# Altium PCB Peak.PcbDoc
Units mil, origin at the board's own origin, x right, y up, seen from the top; angles counter-clockwise.
Board outline 1240 x 1340 mil, 4 copper layers (Top1, Signal2, Gnd3, Bottom4), stack 42.312 mil thick; 62 components, 63 nets, 294 pads, 236 vias.
Unrouted connection lines stored in the file: 56.
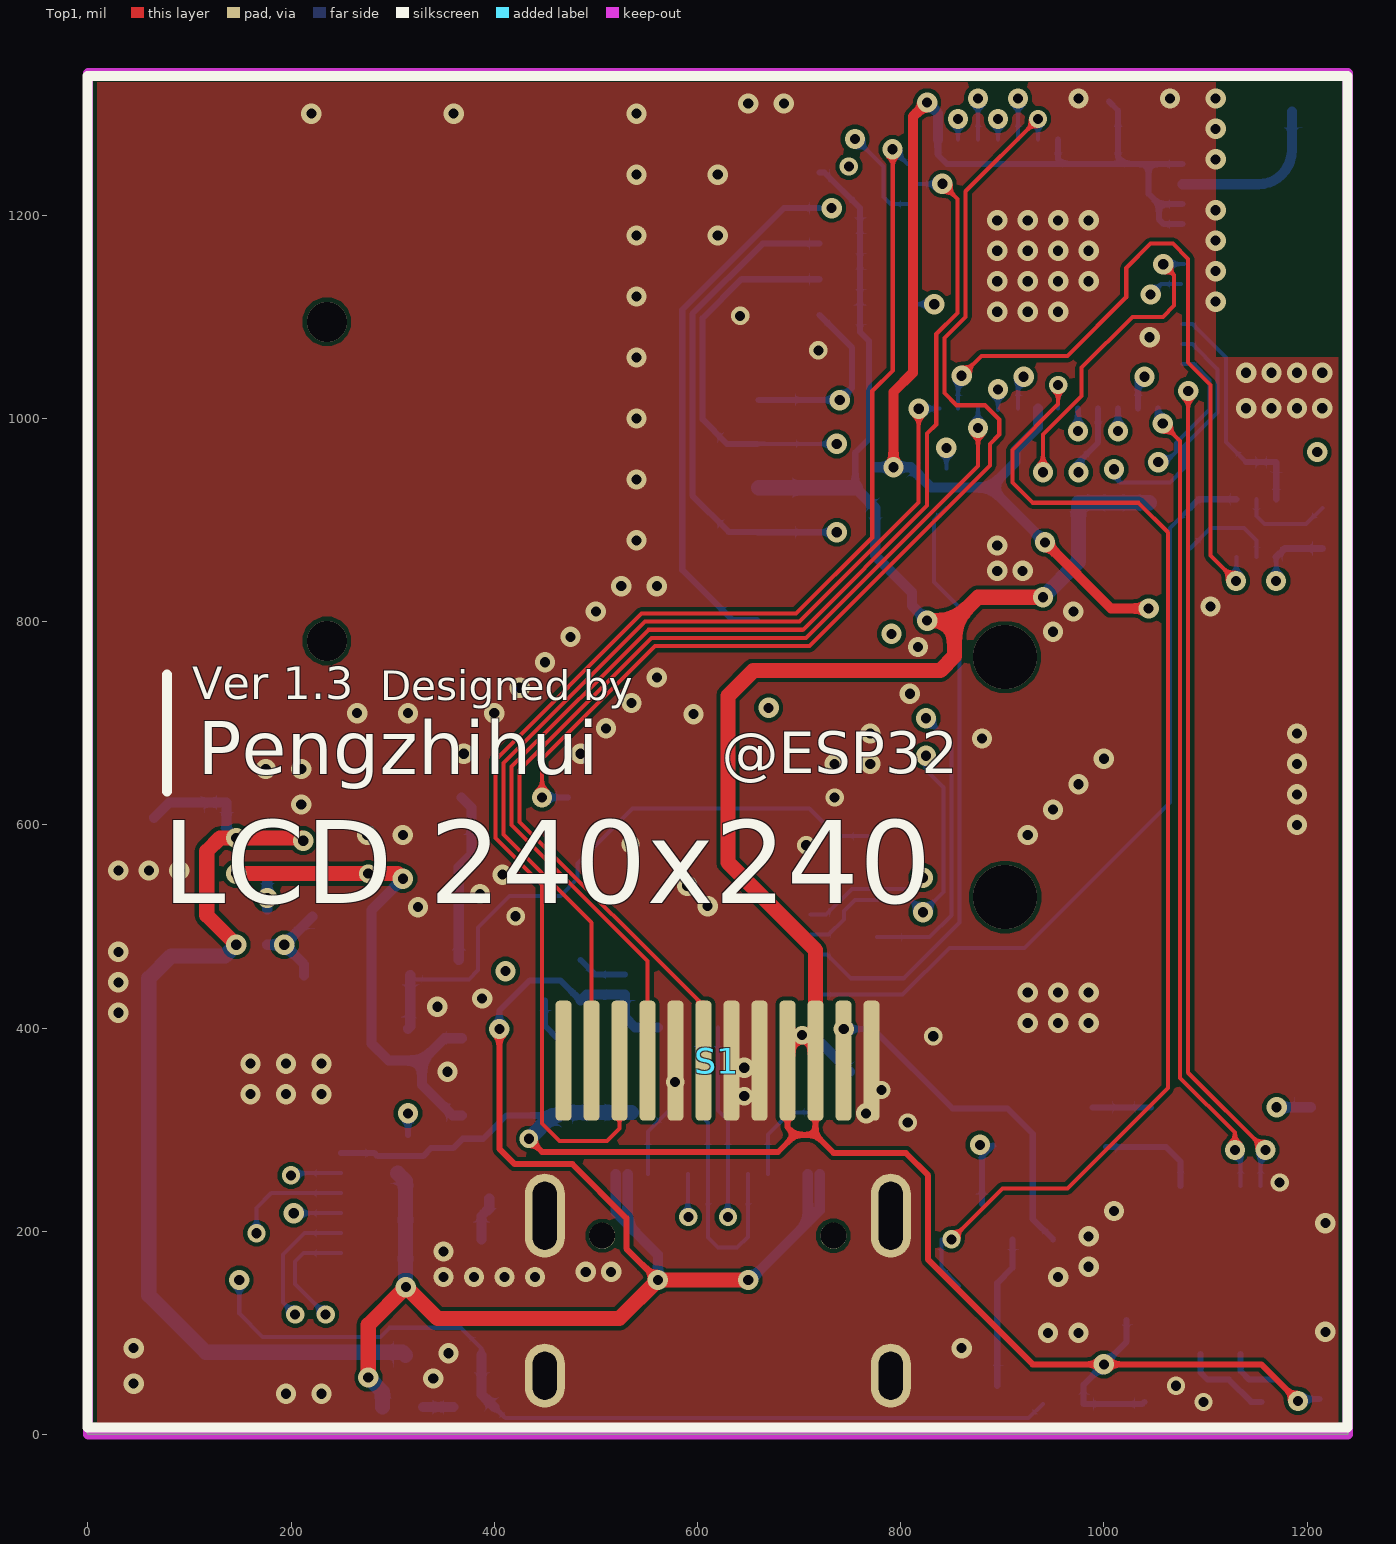
[diagram p0: Top1 view]
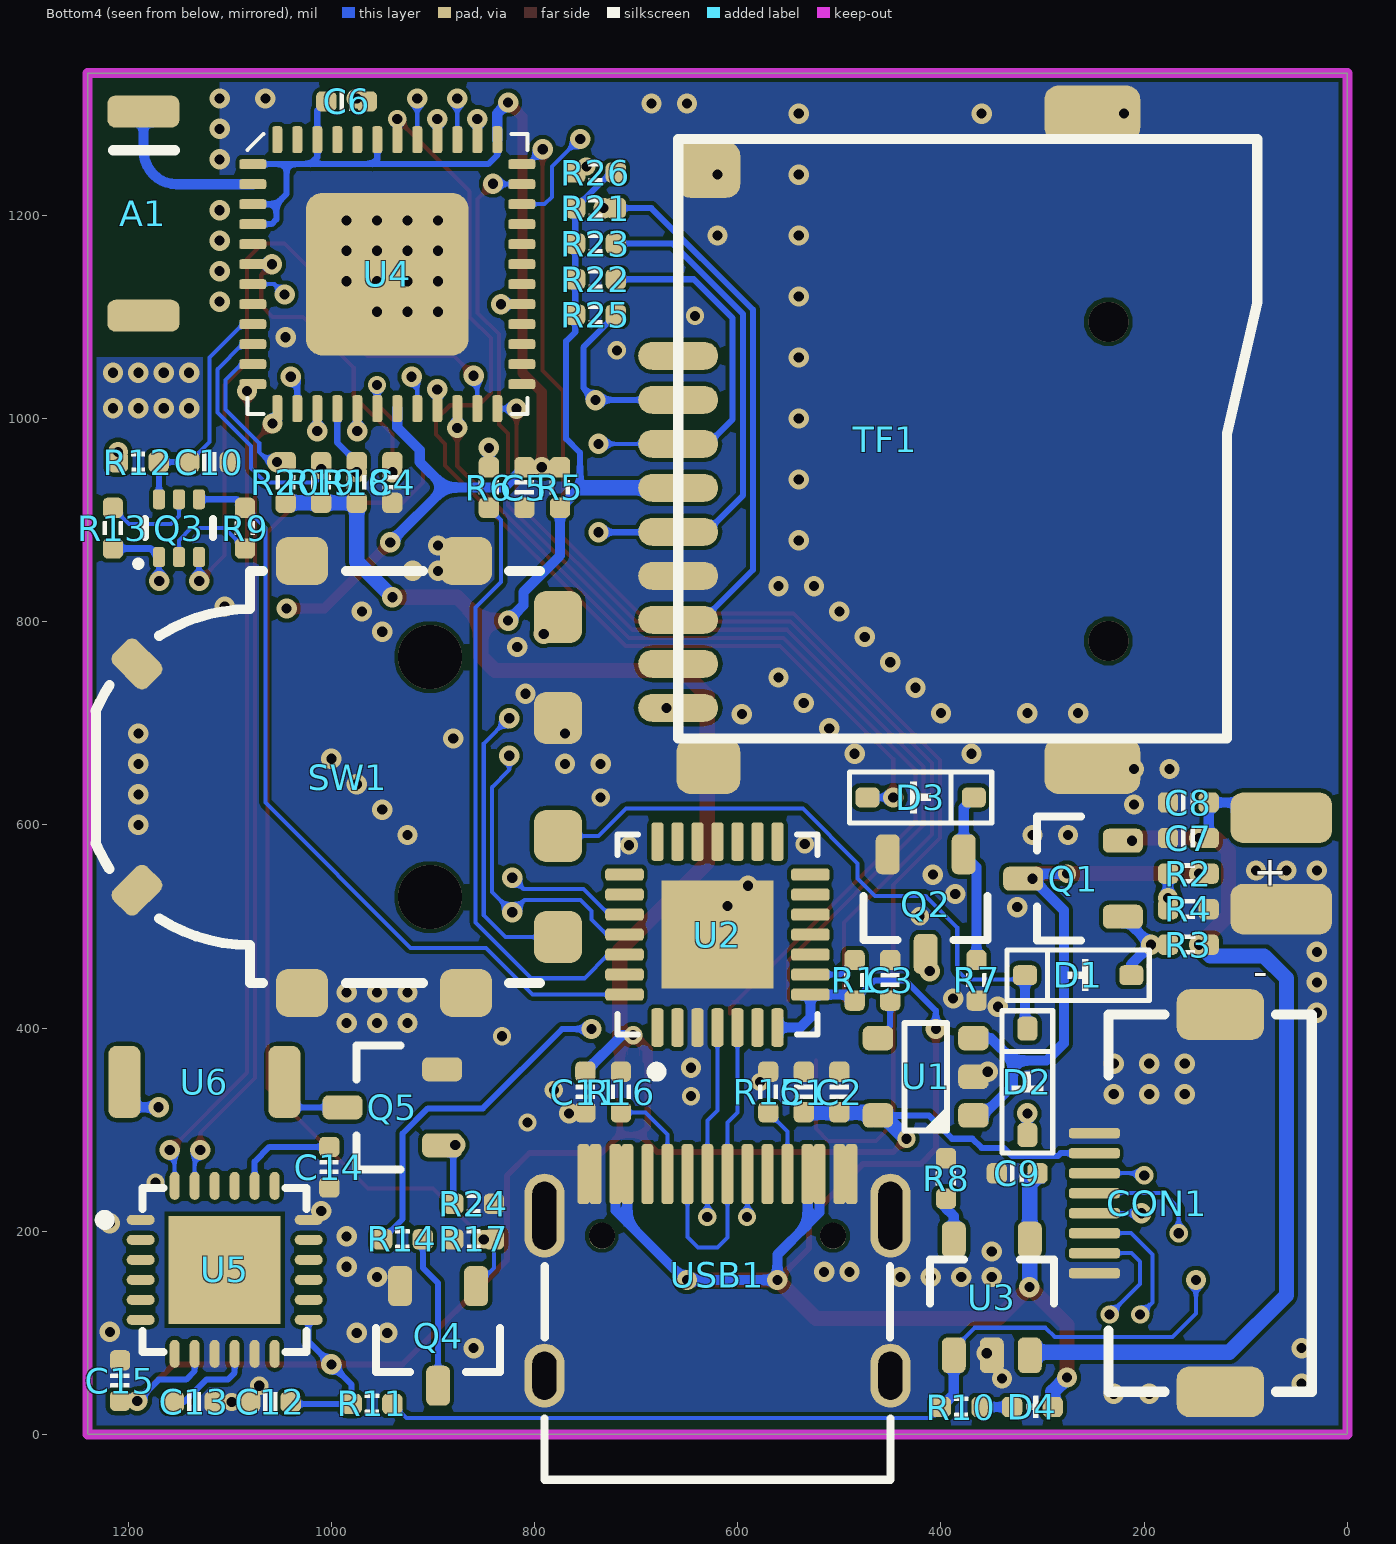
[diagram p1: Bottom4 view, seen from below]
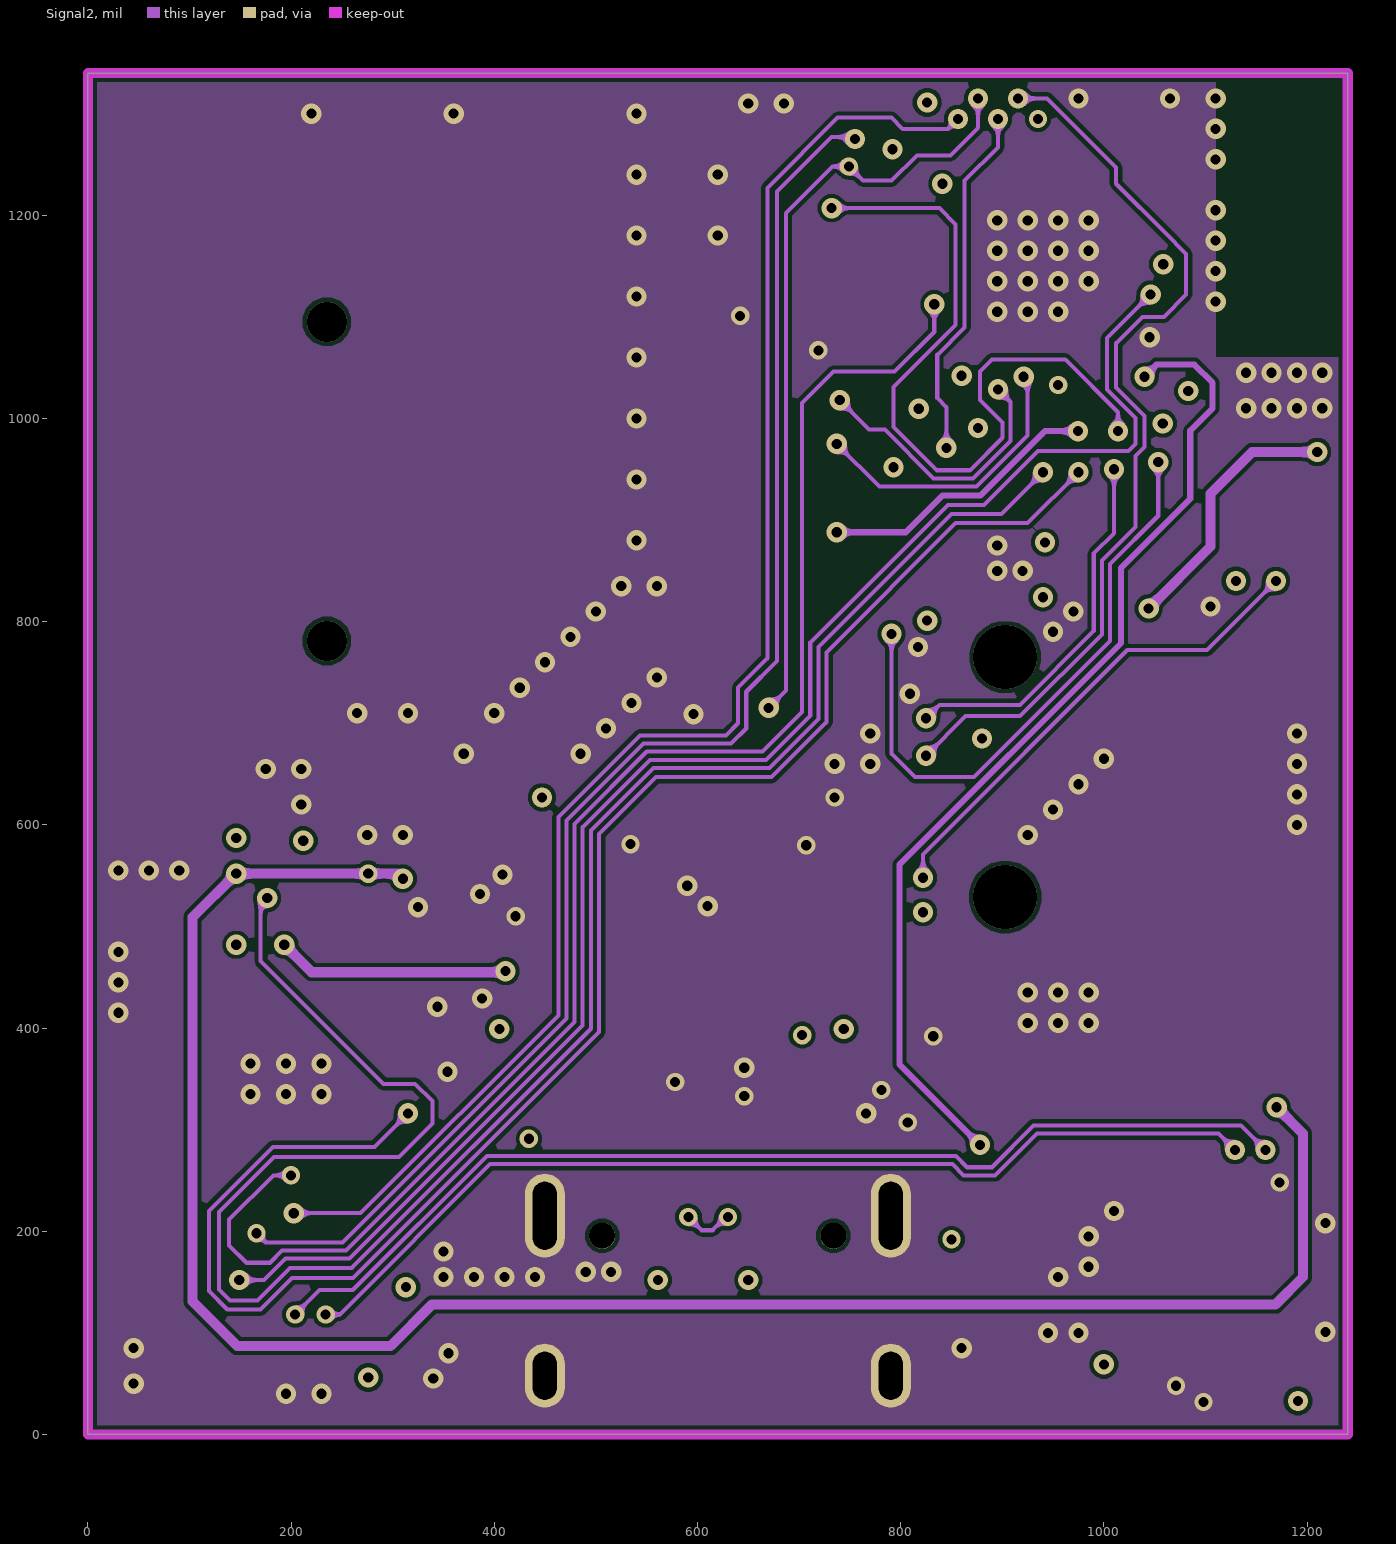
[diagram p2: Signal2]
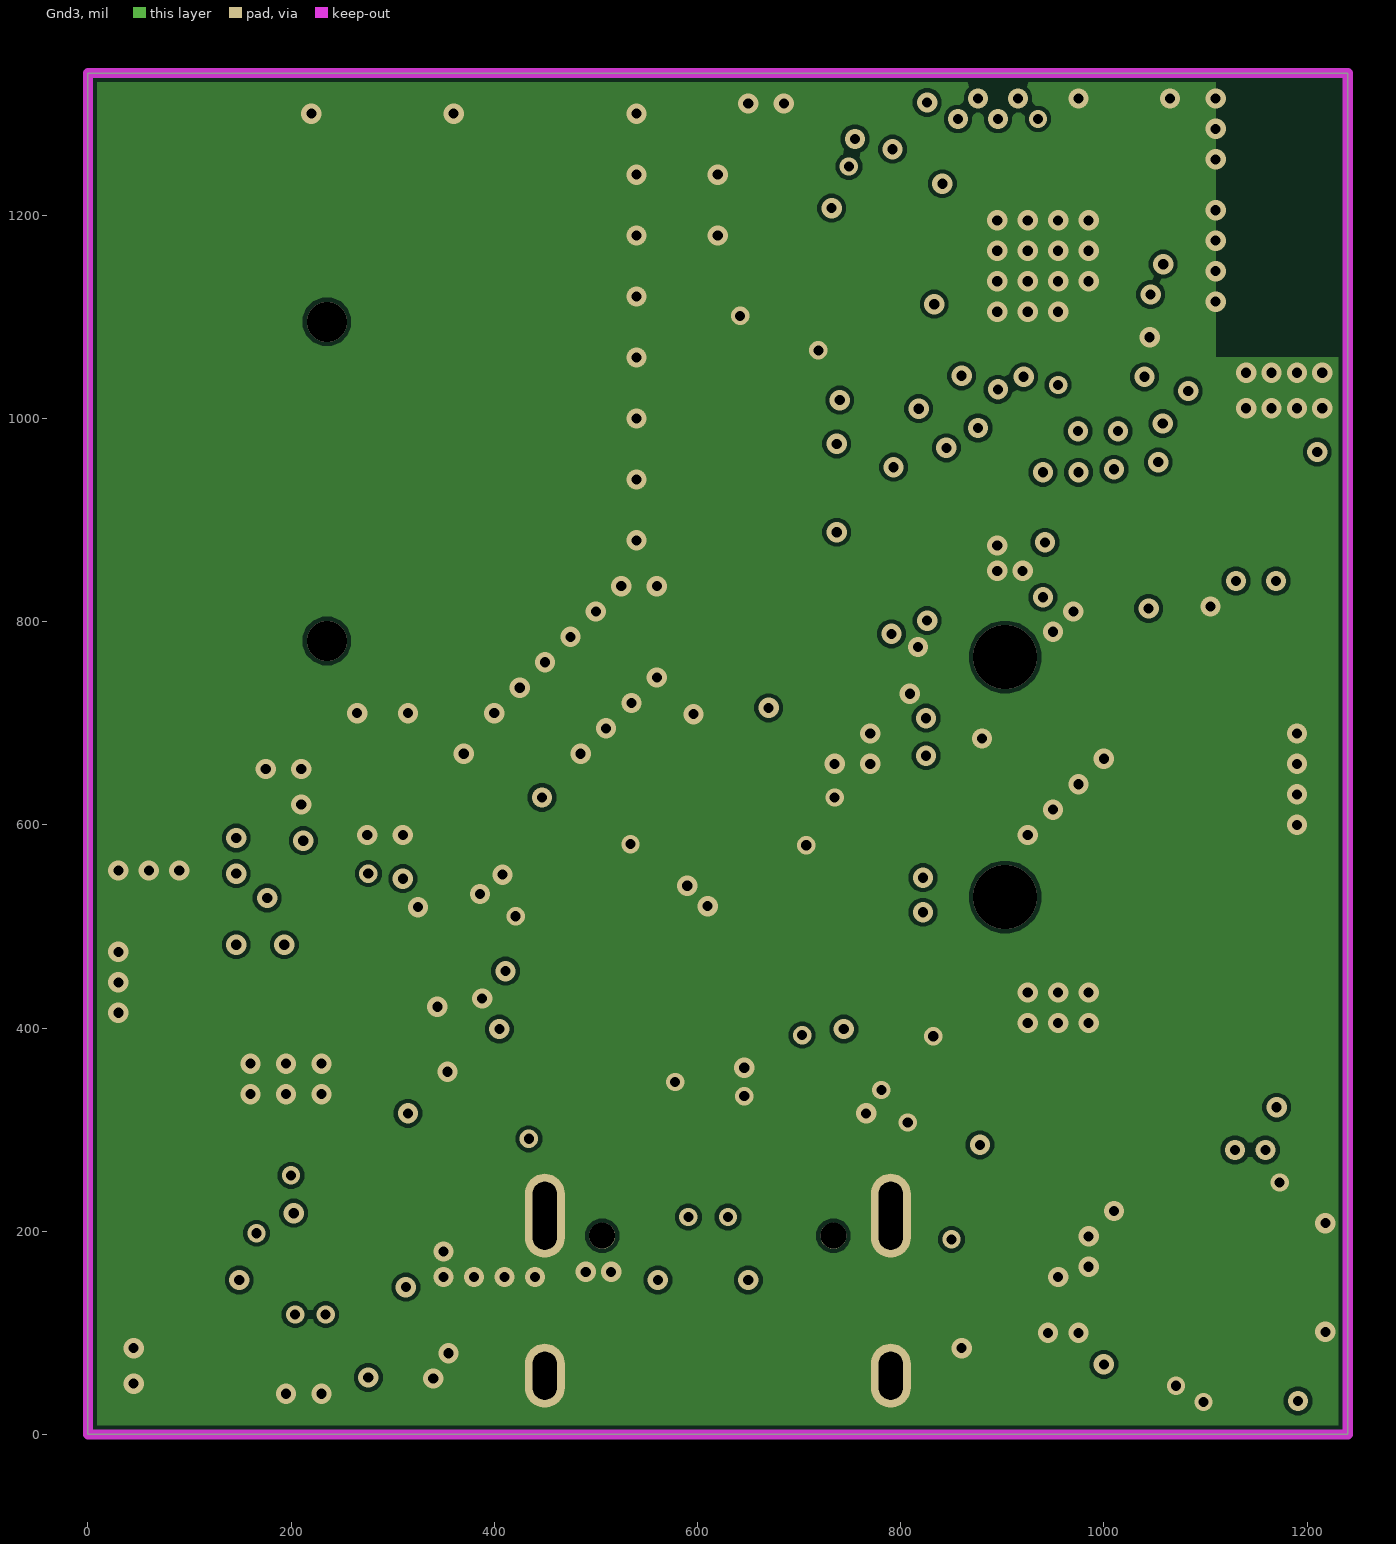
[diagram p3: Gnd3]
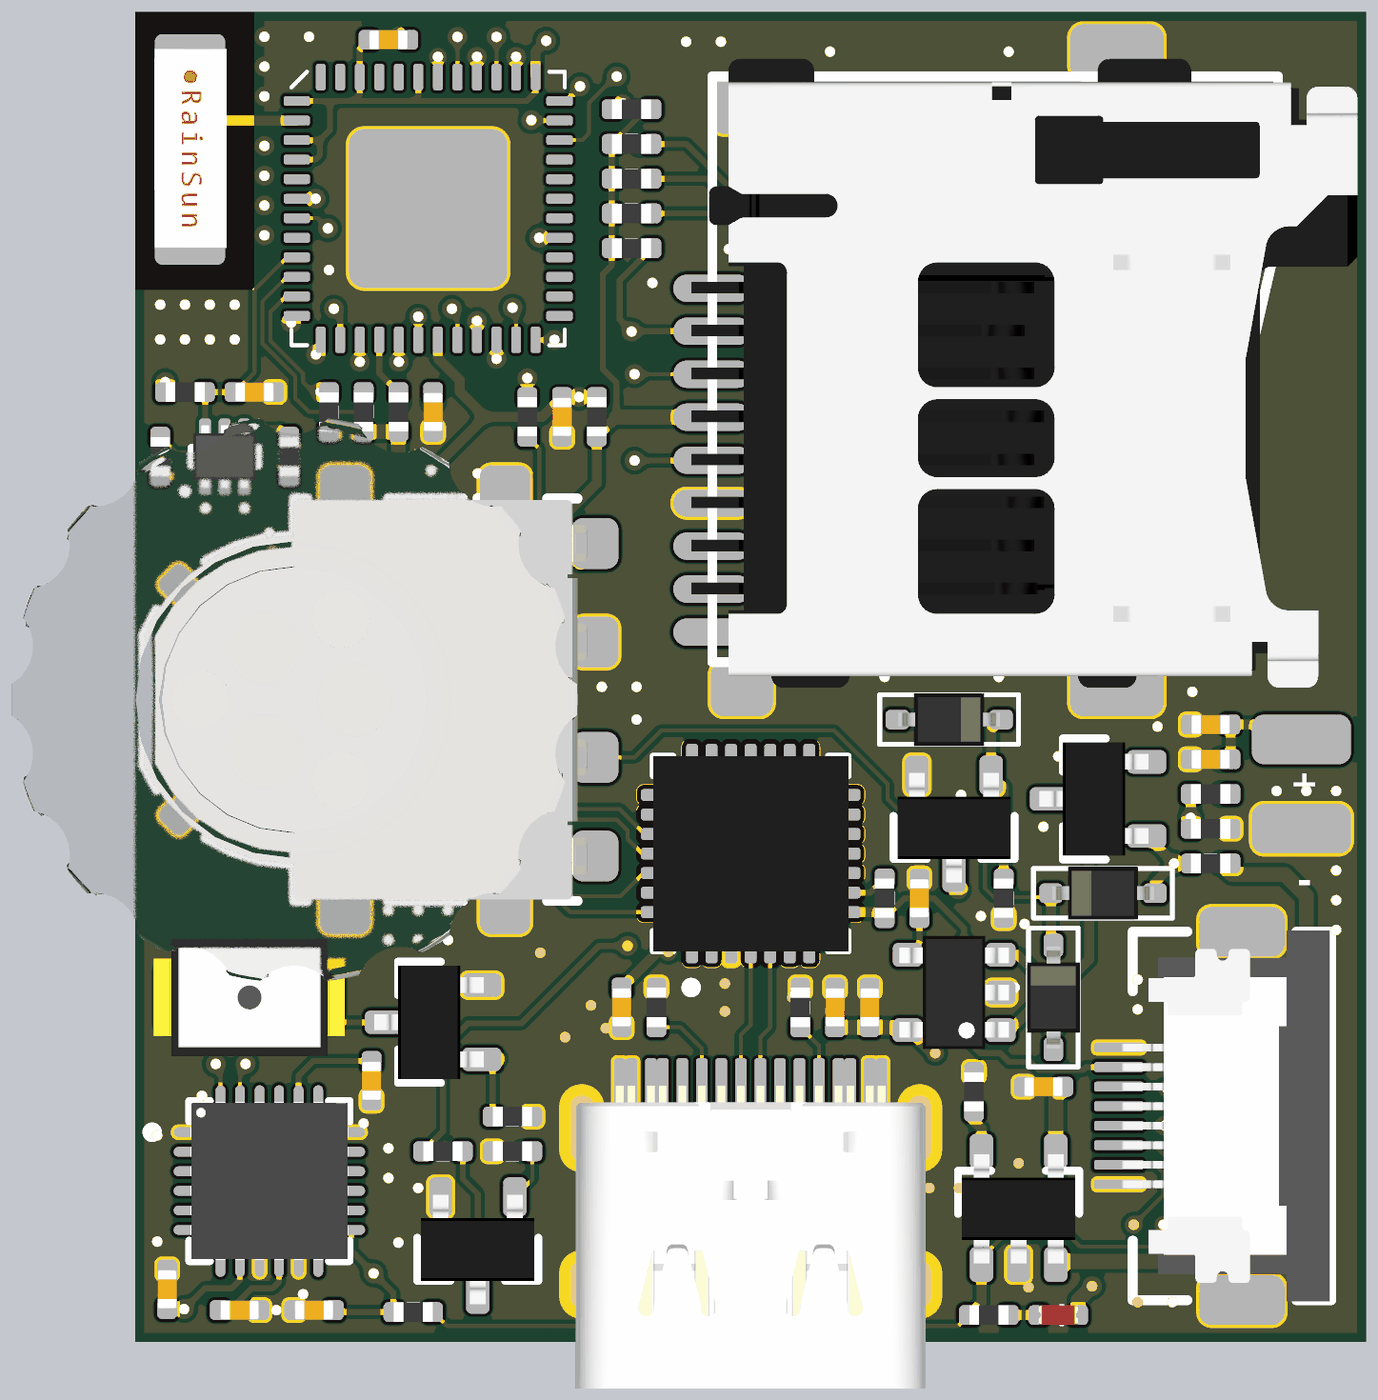
[diagram p4: 3D render of the assembled board from below, using the file's embedded part models]

## Layer stack, top to bottom
Top Solder: solder mask 0.4, Solder Resist, Dk 3.5
Top1: signal copper 1.4
Dielectric 2: prepreg 12.252, PP-006, Dk 4.1
Signal2: signal copper 1.378
Dielectric 1: core 12.252, FR-4, Dk 4.2
Gnd3: signal copper 1.378
Dielectric 3: prepreg 12.252, PP-006, Dk 4.1
Bottom4: signal copper 1.4
Bottom Solder: solder mask 0.4, Solder Resist, Dk 3.5

## Board outline
0,0 0,1340 1240,1340 1240,0

## Design rules (kind name [scope] priority, off if disabled: settings)
Clearance [All] p1: gap=4 ignorepadtopadclearanceinfootprint=FALSE
ComponentClearance [All] p1: gap=0 collisioncheckmode=3 verticalgap=0 showdistances=FALSE
DiffPairsRouting [All] p1: maxlimit=9 minlimit=9 mostfreqgap=9 toplayer_minwidth=4 toplayer_maxwidth=4 toplayer_prefwidth=4 midlayer1_minwidth=4 midlayer1_maxwidth=4 midlayer1_prefwidth=4 midlayer2_minwidth=4 midlayer2_maxwidth=4 midlayer2_prefwidth=4 bottomlayer_minwidth=4 bottomlayer_maxwidth=4 bottomlayer_prefwidth=4 maxuncoupledlength=500
FanoutControl Fanout_BGA [All] p1: bgadir=Out bgaviamode=Centered fanoutstyle=Auto fanoutdirection=Alternating viagrid=1 // Fanout_BGA (Default Rule)
HoleSize [All] p1: absolutevalues=TRUE maxlimit=10000 minlimit=8 maxpercent=80.000 minpercent=20.000
MinimumSolderMaskSliver [All] p1 off: minsoldermaskwidth=2
PlaneClearance [All] p1: clearance=8
PlaneConnect [All] p1: planeconnectstyle=Direct reliefexpansion=20 reliefentries=4 reliefconductorwidth=10 reliefairgap=10
PolygonConnect [All] p1: connectstyle=Direct reliefconductorwidth=10 reliefentries=4 polygonreliefangle="90 Angle" airgapwidth=10
RoutingVias [All] p1: holewidth=8 width=16 viastyle="Through Hole" minholewidth=6 minwidth=12 maxholewidth=28 maxwidth=50
SilkToBoardRegionClearance [All] p1 off:
SilkToSilkClearance [All] p1: silktosilkclearance=0
SilkToSolderMaskClearance [IsPad] p1: minsilkscreentomaskgap=0 clearancetoexposedcopper=TRUE
SolderMaskExpansion [All] p1: expansion=3 istentingtop=FALSE
Width [All] p1: maxlimit=10000 minlimit=4 preferedwidth=4
20 further rules are at their usual default settings.

## Components (designator, comment, footprint, x,y, rotation, side; value= is the part's Value field where it differs from the comment)
A1 "RAINSUN" ANT-Rainsun-AN5120 1185,1202 r270 bottom
C1 "0.1uF" CAP_0402 535,337 r270 bottom value=0.1u
C2 "10uF" CAP_0402 500,337 r270 bottom value=0.1u
C3 "10nF" CAP_0402 450,447 r270 bottom value=0.1u
C4 "0.1uF" CAP_0402 940,937 r90 bottom value=0.1u
C5 "10uF" CAP_0402 810,932 r90 bottom value=0.1u
C6 "0.1uF" CAP_0402 985,1312 r0 bottom value=0.1u
C7 "10uF" CAP_0402 156.5,587 r180 bottom value=0.1u
C8 "0.1uF" CAP_0402 156.5,622 r180 bottom value=0.1u
C9 "10uF" CAP_0402 325,257 r180 bottom value=0.1u
C10 "1uF" CAP_0402 1120,957 r180 bottom value=0.1u
C11 "0.1uF" CAP_0402 750,337 r90 bottom value=0.1u
C12 "10nF" CAP_0402 1060,32 r0 bottom value=0.1u
C13 "0.1uF" CAP_0402 1135,32 r180 bottom value=0.1u
C14 "2.2nF" CAP_0402 1002,263 r90 bottom value=0.1u
C15 "0.1uF" CAP_0402 1208,53 r270 bottom value=0.1u
CON1 "FFC_0.5_8" FFC_0.5_8 160,227.63 r90 bottom locked
D1 "二极管-5819W" SOD-323 265,452 r0 bottom
D2 "二极管-5819W" SOD-323 315,347 r90 bottom
D3 "二极管-5819W" SOD-323 420,627 r180 bottom
D4 "color?" LED_0402_RED 310,27 r0 bottom
Q1 "AO3401A" SOT23-3 270,547 r0 bottom
Q2 "AO3400A" SOT23-3 415,522 r270 bottom
Q3 "BC847BVC-7" SOT563-6 1150,892 r180 bottom
Q4 "AO3400A" SOT23-3 895,97 r270 bottom
Q5 "AO3400A" SOT23-3 940,322 r0 bottom
R1 "10K" RES_0402 485,447 r90 bottom value=22R
R2 "100K" RES_0402 156.5,552 r180 bottom value=22R
R3 "20K" RES_0402 156.5,482 r0 bottom value=22R
R4 "100K" RES_0402 156.5,517 r0 bottom value=22R
R5 "0R" RES_0402 775,932 r90 bottom value=22R
R6 "200R" RES_0402 845,932 r270 bottom value=22R
R7 "20K" RES_0402 365,447 r90 bottom value=22R
R8 "2K" RES_0402 395,252 r90 bottom value=22R
R9 "12K" RES_0402 1085,892 r270 bottom value=22R
R10 "1K" RES_0402 380,27 r0 bottom value=22R
R11 "10K" RES_0402 960,30 r0 bottom value=22R
R12 "10K" RES_0402 1190,957 r180 bottom value=22R
R13 "12K" RES_0402 1215,892 r90 bottom value=22R
R14 "10R" RES_0402 930,192 r0 bottom value=22R
R15 "5.1K" RES_0402 570,337 r270 bottom value=22R
R16 "5.1K" RES_0402 715,337 r90 bottom value=22R
R17 "10K" RES_0402 860,192 r180 bottom value=22R
R18 "10K" RES_0402 975,937 r90 bottom value=22R
R19 "10K" RES_0402 1010,937 r270 bottom value=22R
R20 "10K" RES_0402 1045,937 r270 bottom value=22R
R21 "10K" RES_0402 740,1207 r180 bottom value=22R
R22 "10K" RES_0402 740,1137 r180 bottom value=22R
R23 "10K" RES_0402 740,1172 r180 bottom value=22R
R24 "10K" RES_0402 860,227 r0 bottom value=22R
R25 "10K" RES_0402 740,1102 r180 bottom value=22R
R26 "10K" RES_0402 740,1242 r0 bottom value=22R
S1 "LCD-240x240" LCD-240X240-FLUSH-154 619.65,677 r0 top locked
SW1 "Rotary Encoder" SIQ-02FVS3 1080,647 r90 bottom locked
TF1 "TF" TF-SOCKET 330.63,1242 r180 bottom locked
U1 "LP2992 3V3" SOT23-5#1 415,352 r0 bottom
U2 "CP2102" QFN-28 620,492 r90 bottom value=Value
U3 "MCP73831T" SOT23-5#2 350,137 r90 bottom
U4 "ESP32_SIP" QFN-48_7X7 945,1142 r180 bottom
U5 "MPU6050" QFN-24 1105,162 r180 bottom
U6 "DET402" DET402 1125,347 r180 bottom
USB1 "Type-C" Type-C-TOP 620,157 r270 bottom locked

## Footprints (in the part's own frame and the unit in brackets; to place one, negate y for a bottom-side part, rotate by r counter-clockwise, add the part's x,y. Pads: shape width x height; smd on the part's side, far side on the other; paste and mask are expansions set on the pad)
ANT-Rainsun-AN5120 [mm] "选择焊盘"
  rrect50% 0.8x1.8 smd: 1(-2.54,0) ""(2.563,0)
  silkscreen extent -1.57,-0.76 -1.57,0.79, body extent -2.57,-0.91 2.54,0.94, height 1.32
CAP_0402 [mil]
  rrect50% 20x20 smd: 1(-20,0) 2(20,0)
  silkscreen extent -7,-9 7,9, body extent -20,-10 20,10, height 20
DET402 [mm]
  rrect50% 0.8x1.8 smd: 1(-2,0) 2(2,0)
  body extent -2.45,-1.5 2.44,1.5, height 2.03
FFC_0.5_8 [mil]
  rrect50% 50x86 smd: 0(-185.63,-35) 0(185.63,-35)
  rrect50% 10x50 smd: 1(-68.9,89) 2(-49.21,89) 3(-29.53,89) 4(-9.84,89) 5(9.84,89) 6(29.53,89) 7(49.21,89) 8(68.9,89)
  silkscreen extent -186,-125 186,75, body extent -187,-124 187,87, height 82
LCD-240X240-FLUSH-154 [mm]
  rrect50% 0.4x3 smd: 1(3.851,-7.85) 2(3.151,-7.85) 3(2.451,-7.85) 4(1.751,-7.85) 5(1.051,-7.85) 6(0.351,-7.85) 7(-0.349,-7.85) 8(-1.049,-7.85) 9(-1.749,-7.85) 10(-2.449,-7.85) 11(-3.149,-7.85) 12(-3.849,-7.85)
  silkscreen extent -15.75,-17.02 15.75,16.76, body extent -15.7,-17.02 15.7,16.76
LED_0402_RED [mil]
  rrect50% 20x20 smd: 1(-20,0) 2(20,0)
  silkscreen extent -6,-10 6,10, body extent -20,-10 20,10, height 18
QFN-24 [mm] "QFN, 24-Leads, Body 4.1x4.1mm (max), Pitch 0.50mm, IPC Low Density"
  oval 0.7x0.25 smd: 1(-2.1,1.25) 2(-2.1,0.75) 3(-2.1,0.25) 4(-2.1,-0.25) 5(-2.1,-0.75) 6(-2.1,-1.25) 13(2.1,-1.25) 14(2.1,-0.75) 15(2.1,-0.25) 16(2.1,0.25) 17(2.1,0.75) 18(2.1,1.25)
  oval 0.25x0.7 smd: 7(-1.25,-2.1) 8(-0.75,-2.1) 9(-0.25,-2.1) 10(0.25,-2.1) 11(0.75,-2.1) 12(1.25,-2.1) 19(1.25,2.1) 20(0.75,2.1) 21(0.25,2.1) 22(-0.25,2.1) 23(-0.75,2.1) 24(-1.25,2.1)
  rect 2.8x2.7 smd: ""(0,0)
  silkscreen extent -3.13,-2.05 2.05,2.05, body extent -2.02,-2.02 2.02,2.02, height 0.95
QFN-28 [mil]
  rrect50% 38x12 smd mask+5: 1(-91.5,59.06) 2(-91.5,39.37) 3(-91.5,19.68) 4(-91.5,0) 5(-91.5,-19.68) 6(-91.5,-39.37) 7(-91.5,-59.06) 15(91.5,-59.06) 16(91.5,-39.37) 17(91.5,-19.68) 18(91.5,0) 19(91.5,19.68) 20(91.5,39.37) 21(91.5,59.06)
  rrect50% 12x38 smd mask+5: 8(-59.06,-91.5) 9(-39.37,-91.5) 10(-19.68,-91.5) 11(0,-91.5) 12(19.69,-91.5) 13(39.37,-91.5) 14(59.06,-91.5) 22(59.06,91.5) 23(39.37,91.5) 24(19.69,91.5) 25(0,91.5) 26(-19.68,91.5) 27(-39.37,91.5) 28(-59.06,91.5)
  rect 106.3x110.24 smd: 29(0,0)
  silkscreen extent -140,-98 98,98, body extent -99,-99 98,98, height 35
QFN-48_7X7 [mm]
  rrect50% 0.675x0.25 smd: 1(-3.363,2.75) 2(-3.363,2.25) 3(-3.363,1.75) 4(-3.363,1.25) 5(-3.363,0.75) 6(-3.363,0.25) 7(-3.363,-0.25) 8(-3.363,-0.75) 9(-3.363,-1.25) 10(-3.363,-1.75) 11(-3.363,-2.25) 12(-3.363,-2.75) 25(3.363,-2.75) 26(3.363,-2.25) 27(3.363,-1.75) 28(3.363,-1.25) 29(3.363,-0.75) 30(3.363,-0.25) 31(3.363,0.25) 32(3.363,0.75) 33(3.363,1.25) 34(3.363,1.75) 35(3.363,2.25) 36(3.363,2.75)
  rrect50% 0.25x0.675 smd: 13(-2.75,-3.363) 14(-2.25,-3.363) 15(-1.75,-3.363) 16(-1.25,-3.363) 17(-0.75,-3.363) 18(-0.25,-3.363) 19(0.25,-3.363) 20(0.75,-3.363) 21(1.25,-3.363) 22(1.75,-3.363) 23(2.25,-3.363) 24(2.75,-3.363) 37(2.75,3.363) 38(2.25,3.363) 39(1.75,3.363) 40(1.25,3.363) 41(0.75,3.363) 42(0.25,3.363) 43(-0.25,3.363) 44(-0.75,3.363) 45(-1.25,3.363) 46(-1.75,3.363) 47(-2.25,3.363) 48(-2.75,3.363)
  rrect20% 4.064x4.064 smd: 49(0,0)
  silkscreen extent -3.5,-3.5 3.5,3.5, body extent -3.5,-3.5 3.5,3.5, height 1
RES_0402 [mil]
  rrect50% 20x20 smd: 1(-20,0) 2(20,0)
  silkscreen extent -7,-10 7,10, body extent -20,-10 20,10, height 14
SIQ-02FVS3 [mm]
  rrect50% 1.3x1.2 smd: 1(-4,-7.7) 2(-1.475,-7.7) 3(1.475,-7.7) 4(4,-7.7)
  rrect50% 1.2x1.3 smd: 5(-5.4,-5.4) 5(-5.4,-1.3) 5(5.4,-5.4) 5(5.4,-1.3)
  rrect50% 0.85x1.2 smd rot 45: 5(-2.828,2.828)
  rrect50% 0.85x1.2 smd rot 135: 5(2.828,2.828)
  silkscreen extent -5.15,-7.25 5.15,3.86, body extent -7.2,-7.5 7.2,7.25, height 4.06
SOD-323 [mm]
  rrect50% 0.6x0.5 smd: 1(-1.329,0) 2(1.329,0)
  silkscreen extent -1.78,-0.64 1.78,0.64, body extent -1.3,-0.68 1.3,0.67, height 1.15
SOT23-3 [mm] "SOT23, 3-Leads, Body 3.1x3.0mm (max), Pitch 0.95mm, IPC Medium Density"
  rrect50% 1x0.6 smd: 1(-1.246,0.95) 2(-1.246,-0.95) 3(1.246,0)
  silkscreen extent -0.2,-1.55 0.9,1.55, body extent -1.3,-1.45 1.5,1.45, height 1.2
SOT23-5#1 [mil]
  rrect50% 30x24 smd: 1(-47,38) 2(-47,0) 3(-47,-38) 4(47,-38) 5(47,38)
  silkscreen extent -21,-53 21,53, body extent -55,-57 55,57, height 57
SOT23-5#2 [mil] "SOT23, 3-Leads, Body 3.1x3.0mm (max), Pitch 0.95mm, IPC Medium Density"
  rrect50% 35x23.62 smd: 1(-59.06,37.4) 2(-59.06,0) 3(-59.06,-37.4) 4(54.94,-37.4) 5(54.94,37.4)
  silkscreen extent -8,-61 35,61, body extent -58,-57 52,57, height 47
SOT563-6 [mm]
  rrect50% 0.305x0.5 smd paste+0 mask+0: 1(-0.5,-0.723) 2(0,-0.723) 3(0.5,-0.723) 4(0.5,0.723) 5(0,0.723) 6(-0.5,0.723)
  silkscreen extent -1.09,-0.97 0.85,0.23, body extent -0.8,-0.8 0.8,0.8, height 0.6
TF-SOCKET [mm]
  oval 2x0.7 smd: 1(-8.331,-4.582) 2(-8.331,-5.682) 3(-8.331,-6.782) 4(-8.331,-7.882) 5(-8.331,-8.982) 6(-8.331,-10.082) 7(-8.331,-11.182) 8(-8.331,-12.282) 9(-8.331,-13.382)
  rrect50% 1.6x1.4 smd: 10(-7.577,-14.836) 10(-7.577,0.068)
  rrect50% 2.4x1.4 smd: 10(2.023,-14.836) 10(2.023,1.476)
  silkscreen extent -8.33,-14.15 6.15,0.84, body extent -8.87,-14.81 8.18,1.29, height 2.05
Type-C-TOP [mm]
  round 0.65 hole 0.65: 0(-0.98,-2.89) 0(-0.98,2.89)
  oval 1.6x1 hole 0.6 slot 1.2 at 0 deg: 1(2.52,4.325) 2(2.52,-4.325)
  oval 2.1x1 hole 0.6 slot 1.7 at 0 deg: 3(-1.48,-4.325) 4(-1.48,4.325)
  rrect50% 1.5x0.3 smd: A1(-2.52,-3.35) A4(-2.52,-2.55) A5(-2.52,-1.25) A6(-2.52,-0.25) A7(-2.52,0.25) A8(-2.52,1.25) A9(-2.52,2.55) A12(-2.52,3.35) B1(-2.52,3.05) B4(-2.52,2.25) B5(-2.52,1.75) B6(-2.52,0.75) B7(-2.52,-0.75) B8(-2.52,-1.75) B9(-2.52,-2.25) B12(-2.52,-3.05)
  silkscreen extent -0.22,-4.33 5.12,4.33, body extent -2.57,-4.48 5.18,4.47, height 3.26

## Part data
A1: library part ANT-Rainsun-AP5120
C1 C2 C3 C4 C5 C6 C7 C8 C9 C10 C11 C12 C13 C14 C15: library part 电容-0402, "Capacitor"
CON1: "FFC", System=Connector
D1 D2 D3: "40V"
D4: library part LED_0402, "LED", Type=0402
Q1: "P-MOS"
Q2 Q4 Q5: "N-MOS"
R1 R2 R3 R4 R5 R6 R7 R8 R9 R10 R11 R12 R13 R14 R15 R16 R17 R18 R19 R20 R21 R22 R23 R24 R25 R26: library part 电阻-0402, "Resistor"
S1: "显示屏"
SW1: BOM_JLCPCB Part Class="Extended Part", BOM_Manufacturer=ALPSALPINE, BOM_Manufacturer Part=EC11E1534443, BOM_Supplier=LCSC, BOM_Supplier Part=C1322543, Contributor=LCSC, spicePre=S, spiceSymbolName=EC11E1534443
TF1: library part TF卡座, "8脚自弹"
U1: library part LP2992, "LDO"
U2: "USB转TTL", MFG #1="SILICON LABS", PART DESC="SINGLE-CHIP USB TO UART BRIDGE, QFN28, RoHS.", PART NUMBER=CP2102, RefDes=RefDes, Type=DEV
U4: library part ESP32-PICO
U5: "六轴传感器"
USB1: library part USB-Type-C-TOP

## Free pads (board coordinates)
  rrect50% 100x50 smd far side: ""(65,517) ""(65,607)

## Via types
v1: diameter 20, hole 10, Top1 to Bottom4, tented both sides, 205 vias
v2: diameter 18, hole 10, Top1 to Bottom4, tented both sides, 27 vias
v3: diameter 39.37, hole 39.37, Top1 to Bottom4, tented both sides, 2 vias
v4: diameter 62.99, hole 62.99, Top1 to Bottom4, tented both sides, 2 vias

## Nets (pads, with @x,y where several pads share a name; then routed paths per layer and width w, separated by ;. In a path a pad name is that pad's centre, name@x,y a point inside that pad or via, vN(x,y) a via of type N, cw(c..) or ccw(c..) an arc to the next point about the centre after c; other vN are vias at no path point)
3V3A: C5.2 C6.2 R5.2 R12.1 U4.1 U4.3 U4.4 U4.19 U4.37 U4.43 U4.46 | length 1558.6
  Top1 w10: v1(793,952) 793,1026 812,1045 812,1297 v1(826,1311) ; v1(942,878) 1007,813 v1(1044,813)
  Signal2 w10: v1(1044,813) 1105,874 1105,926 1146,967 v1(1210,967)
  Bottom4 w6: U4.37 836.73,1259.27 845.73,1250.27 959.73,1250.27 ; U4.43 954.84,1255.16 959.73,1250.27 ; C6.2 1013.9,1303.1 U4.46 1013.9,1257.1 1020.73,1250.27 ; U4.4 1058.79,1191.21 1054.1,1195.9 1054.1,1210.9 ; U4.3 1054.1,1210.9 ; U4.1 1044,1250.27 ; 959.73,1250.27 1020.73,1250.27 ; 1020.73,1250.27 1044,1250.27 ; 1044,1250.27 1044,1221 1054.1,1210.9
  Bottom4 w10: R5.2 v1(793,952) C5.2 830,932 888,932 ; v1(826,1311) 836.73,1300.27 U4.37 ; U4.19 935.16,991.16 913,969 913,957 888,932 ; v1(942,878) 888,932
BAT_DET: C4.2 R2.1 R4.2 U4.6 | length 2279
  Top1 w4: v1(940,947) 940,984 978,1022 978,1050 1028,1100 1058,1100 1069,1111 1069,1141.2 v1(1058.36,1151.84)
  Signal2 w4: v1(176.5,528) 170,521.5 170,466 291,345 322,345 339,328 339,306 306,273 183.31,273 129.16,218.84 129.16,142.84 140,132 167,132 199,164 259.69,164 495,399.31 495,594.31 556.69,656 670.69,656 719,704.31 719,775 850,906 899,906 v1(940,947)
  Bottom4 w4: v1(1058.36,1151.84) U4.6 U4.6@1078.76,1151.84
  Bottom4 w10: R4.2 v1(176.5,528) R2.1
BOOT: Q3.3 U4.23 | length 693.9
  Top1 w4: v1(860,1042) 879.5,1061.5 964.19,1061.5 1022,1119.31 1022,1148 1046,1172 1068,1172 1083,1157 1083,1055 1105,1033 1105,865 v1(1130,840)
  Bottom4 w4: U4.23 856.42,1038.42 v1(860,1042) ; v1(1130,840) 1130.32,840.31 Q3.3
BUZZ: Q5.1 R24.2 U4.14 | length 1085.9
  Signal2 w6: v1(878,285) 799,364 799,561 1017,779 1017,853 1085,921 1085,988 1107,1010 1107,1035 1089,1053 1052,1053 v1(1040,1041)
  Bottom4 w6: R24.2 880,273.65 Q5.1 ; U4.14 1033.58,1034.58 v1(1040,1041)
CHG_DET: R10.2 R11.1 U3.1 U4.7 | length 2496
  Signal2 w4: v1(149,152) 173.54,152 194.54,173 257.37,173 487,402.63 487,597.63 553.37,664 667.37,664 711,707.63 711,779.27 846.73,915 882.08,915 935.08,968 1024,968 1031,975 1031,1000.31 1003,1028.31 1003,1079 v1(1046,1122)
  Bottom4 w4: v1(149,152) 149,119 172,96 288,96 297,105 367,105 387.4,84.6 U3.1 ; R10.2 411,16 926,16 R11.1 ; v1(1046,1122) 1056.16,1132.16 U4.7@1076,1132.16
  Bottom4 w10: U3.1 387.4,39.6 R10.2
CP_Rx: U2.25 U4.41 | length 1249.3
  Signal2 w4: v1(825,668) 864,707 917.64,707 998,787.36 998,860.04 1031,893.04 1031,963 1040,972 1040,1002.63 1012,1030.63 1012,1074 1038,1100 1059,1100 1081,1122 1081,1162 1060,1183 1012,1231 1012,1247 944.1,1314.9 v1(915.47,1314.9)
  Bottom4 w4: U2.25 729,492 744,507 744,515 755,526 810,526 v1(822,514) 842,534 842,637 825,654 v1(825,668) ; U4.41 v1(915.47,1314.9)
CP_Tx: R6.1 U4.40 | length 393.1
  Signal2 w4: v1(845,971.02) 845,1011 836,1020 836,1062.69 863,1089.69 863,1234 895.79,1266.79 v1(895.79,1294.79)
  Bottom4 w4: R6.1@845,950.62 R6.1 v1(845,971.02) ; U4.40 v1(895.79,1294.79)
DTR: Q3.4 R9.1 U2.28 | length 778.9
  Bottom4 w4: U2.28 801.95,432.94 848,479 922,479 1065,622 1065,892 R9.1
  Bottom4 w6: R9.1 1093.46,920.46 Q3.4
EC_A: R19.1 SW1.1 U4.10 | length 901.7
  Signal2 w4: v1(825,705) 838,718 917.33,718 990,790.67 990,867 1010,887 v1(1010,950)
  Bottom4 w4: SW1.1 828.52,489.52 850,511 850,680 v1(825,705) ; R19.1 v1(1010,950) 1010,943 1016,937 1065,937 1079,951 1079,972.69 1112,1005.69 1112,1048.42 1087.32,1073.1 U4.10
EC_B: R20.1 SW1.4 U4.11 | length 741.5
  Signal2 w4: v1(791,788) 791,670 814,647 872,647 1006,781 1006,856.73 1053.5,904.23 v1(1053.5,957)
  Bottom4 w4: R20.1 v1(1053.5,957) 1061,957 1071,967 1071,976 1104,1009 1104,1038 1088.58,1053.42 U4.11
EC_KEY: D1.2 D2.2 SW1.2 | length 629
  Bottom4 w4: D1.2 321.34,448 375,448 384,457 384,499 415,530 465,530 482,547 482,562 536,616 710,616 737.07,588.93 SW1.2
  Bottom4 w10: D2.2 317.34,401.68 317.34,448 D1.2
EC_KEY_DET: D2.1 R18.2 U4.16 | length 1755.9
  Signal2 w4: v1(315,316) 282,283 182,283 119,220 119,141.16 137.16,123 170,123 201,154 261,154 503,396 503,591 559,647 673,647 727,701 727,769.82 854.18,897 925,897 v1(975,947)
  Bottom4 w6: D2.1 v1(315,316) ; R18.2 994.21,976.21 U4.16
ESP_EN: C10.1 Q3.6 R12.2 U4.9 | length 233.5
  Bottom4 w4: U4.9 1087.21,1092.79 1120,1060 1120,977 C10.1
  Bottom4 w6: C10.1 1169.37,957 1169.69,956.68 Q3.6
FLASH_CLK: U4.31
FLASH_CS: U4.25
FLASH_SD0: U4.27
FLASH_SD1: U4.33
FLASH_SD2: U4.30
FLASH_SD3: U4.32
GND: C1.1 C2.1 C3.1 C4.1 C5.1 C6.1 C7.1 C8.1 C9.1 C10.2 C11.1 C12.2 C13.2 C14.1 C15.1 CON1.0 CON1.1 CON1.8 pad.@65,517 Q2.2 Q4.2 Q5.2 R4.1 R7.1 R8.2 R15.1 R16.2 R17.1 R24.1 S1.1 S1.5 S1.6 S1.8 SW1.3 SW1.5 TF1.6 TF1.10 U1.2 U2.3 U2.29 U3.2 U4.49 U5.1 U5.9 U5.11 U5.18 USB1.1 USB1.2 USB1.3 USB1.4 USB1.A1 USB1.A12 USB1.B1 USB1.B12
  other v1: 195,40 230,40 45,50 340,55 355,80 45,85 860,85 945,100 975,100 1218,101 350,155 380,155 410,155 440,155 955,155 490,160 515,160 985,165 350,180 985,195 1218,208 1010,220 766,316 160,335 195,335 230,335 354,357 646,361 160,365 195,365 230,365 925,405 955,405 985,405 30,415 344,421 388,429 925,435 955,435 985,435 30,445 30,475 325,519 610,520 386,532 590,540 408,551 30,555 60,555 90,555 275,590 310,590 925,590 1190,600 950,615 210,620 1190,630 975,640 175,655 210,655 735,660 770,660 1190,660 1000,665 370,670 485,670 880,685 770,690 1190,690 510,695 596,709 265,710 315,710 400,710 535,720 809,729 425,735 560,745 450,760 817,775 475,785 950,790 500,810 970,810 1105,815 525,835 560,835 895,850 920,850 895,875 540,880 540,940 540,1000 1140,1010 1165,1010 1190,1010 1215,1010 1140,1045 1165,1045 1190,1045 1215,1045 540,1060 1045,1080 895,1105 925,1105 955,1105 1110,1115 540,1120 895,1135 925,1135 955,1135 985,1135 1110,1145 895,1165 925,1165 955,1165 985,1165 1110,1175 540,1180 620,1180 895,1195 925,1195 955,1195 985,1195 1110,1205 540,1240 620,1240 1110,1255 1110,1285 220,1300 360,1300 540,1300 650,1310 685,1310 975,1315 1065,1315 1110,1315
  other v2: 1098,32 1071,48 1173,248 807,307 646,333 781,339 578,347 832,392 421,510 707,580 534,581 735,627 719,1067 642,1101
GPIO2: S1.7 U4.22 | length 948.3
  Top1 w4: S1.7@607.66,414.28 607.66,420.34 425,603 425,654.06 554.94,784 706.94,784 876.1,953.16 v1(876.1,990.59)
  Bottom4 w4: v1(876.1,990.59) U4.22 U4.22@876.1,1011
GPIO4: S1.11 U4.24 | length 897.3
  Top1 w4: 495.66,427 495.66,503.65 409,590.31 409,660.69 548.31,800 700.31,800 817.71,917.39 v1(817.71,1009.62)
  Bottom4 w4: v1(817.71,1009.62) U4.24 U4.24@838.11,1009.62
GPIO5: CON1.5 U4.34 | length 1665.9
  Signal2 w4: v2(166,198) 175,189 250.75,189 471,409.25 471,604.25 546.75,680 633,680 648,695 648,731 678.34,761.34 678.34,1223.34 732,1277 753,1277 v1(755,1275)
  Bottom4 w4: v2(166,198) 166,223 180.47,237.47 CON1.5 ; v1(755,1275) 756,1275 783,1248 783,1218 790.1,1210.9 U4.34
GPIO9: U4.28
GPIO10: CON1.6 U4.29 | length 1575
  Signal2 w4: v2(200,255) 182.63,255 139,211.37 139,186 156,169 179.23,169 191.23,181 254.06,181 479,405.94 479,600.94 550.06,672 664.06,672 703,710.94 703,1015 734,1046 794,1046 833.02,1085.02 v1(833.02,1112.47)
  Bottom4 w4: v2(200,255) 202.16,257.16 CON1.6 ; U4.29 v1(833.02,1112.47)
GPIO12: Q4.1 R17.2 U4.18 | length 1210.5
  Top1 w4: v2(850,192) 900,242 964,242 1063,341 1063,888 1034,917 930,917 910,937 910,969 955,1014 v2(955,1033)
  Bottom4 w4: Q4.1 840,163.65 R17.2 ; U4.18 955,1009.78 v2(955,1033) ; R17.2 v2(850,192) 845,187 R17.2
GPIO13: R22.2 TF1.3 U4.20 | length 691.7
  Signal2 w4: v1(737,975) 779,933 874.63,933 925,983.37 925,1037 v1(921,1041)
  Bottom4 w4: TF1.3 v1(737,975) ; U4.20 915.47,1035.47 v1(921,1041)
  Bottom4 w6: TF1.3 629,975 605,999 605,1098.72 643.28,1137 R22.2
GPIO14: R23.2 TF1.5 U4.17 | length 790.3
  Signal2 w6: v1(737,888) 805,888 841,924 878.36,924 941.88,987.53 v1(974.53,987.53)
  Bottom4 w6: R23.2 664.14,1172 595,1102.86 595,924 630.61,888.39 TF1.5 659.02,888 v1(737,888) ; v1(974.53,987.53) U4.17
GPIO15: R25.2 TF1.2 U4.21 | length 473.6
  Signal2 w4: v1(740,1018) 769,989 784.4,989 832.4,941 871.31,941 908,977.69 908,1016.43 v1(895.79,1028.64)
  Bottom4 w4: U4.21@895.79,1008.24 U4.21 v1(895.79,1028.64)
  Bottom4 w6: TF1.2@660,1018.31 740.31,1018.31 752,1030 752,1070 R25.2
GPIO18: S1.9 U4.35 | length 1165.1
  Top1 w4: 550.78,427 550.78,465.91 417,599.69 417,657.37 551.63,792 703.63,792 826,914.37 826,985 835,994 835,1083 856,1104 856,1216 v1(841,1231)
  Bottom4 w4: U4.35 840.58,1230.58 v1(841,1231)
GPIO19: CON1.4 U4.38 | length 1581.8
  Signal2 w4: v1(202.58,217.79) 268.22,217.79 463,412.57 463,607.57 543.43,688 628,688 640,700 640,735 669,764 669,1227 738,1296 791,1296 802,1285 846.63,1285 v1(856.42,1294.79)
  Bottom4 w4: v1(202.58,217.79) CON1.4 ; U4.38 v1(856.42,1294.79)
GPIO21: D3.1 U4.42 | length 1065.9
  Top1 w4: v1(447,627) 447,664.75 558.25,776 710.25,776 888,953.75 888,975 897,984 897,999 883,1013 855,1013 843,1025 843,1079 864,1100 864,1223.63 v2(935.16,1294.79)
  Bottom4 w4: U4.42 v2(935.16,1294.79)
  Bottom4 w6: v1(447,627) D3.1
GPIO22: R26.2 TF1.9 U4.39 | length 798.7
  Signal2 w4: v1(670,715.16) 687,732.16 687,1202 733,1248 v2(749,1248) 763,1234 791,1234 816,1259 849,1259 876.1,1286.1 v1(876.1,1314.9)
  Bottom4 w4: U4.39 v1(876.1,1314.9)
GPIO23: S1.10 U4.36 | length 1411
  Top1 w4: S1.10 523.22,301.22 511,289 464,289 447,306 447,541 401,587 401,664 545,808 697,808 772,883 772,1027 792.21,1047.21 792.21,1264.79 v1(792,1265)
  Bottom4 w4: v1(792,1265) 806.73,1250.27 U4.36
GPIO26: R21.2 TF1.7 U4.15 | length 1294.7
  Signal2 w4: v1(732,1207) 838,1207 854,1191 854,1092 793,1031 793,991.71 835.71,949 868,949 900,981 900,996 878,1018 878,1046 890,1058 962,1058 1013.9,1006.1 v1(1013.9,987.53)
  Bottom4 w6: TF1.7 634.23,801.77 585,851 585,1107 685,1207 R21.2 ; v1(1013.9,987.53) U4.15
GPIO32: CON1.3 U4.12 U5.24 | length 1996.6
  Top1 w4: v1(1083,1027) 1083,356 v1(1159,280)
  Signal2 w4: v2(204,118) 228,142 260.69,142 392.69,274 854.31,274 865.31,263 889.69,263 930.69,304 1135,304 v1(1159,280)
  Bottom4 w4: v2(204,118) 192,130 192,177 213.1,198.1 CON1.3 ; U5.24 1154.21,275.21 v1(1159,280)
GPIO33: CON1.2 U4.13 U5.23 | length 1896
  Top1 w4: v1(1058,995) 1075,978 1075,351 1129,297 v1(1129,280)
  Signal2 w4: v2(234,118) 248,118 396,266 851,266 862,255 893,255 934,296 1113,296 v1(1129,280)
  Bottom4 w4: v2(234,118) 204,148 204,170 212.42,178.42 CON1.2 ; v1(1129,280) 1134.53,274.47 U5.23
  Bottom4 w6: U4.13 1053.27,999.73 v1(1058,995)
LCD_LEDK: R14.2 S1.2 | length 340.9
  Bottom4 w6: v1(744,399) 773,399 851,321 905,321 930,296 930,212 R14.2
NetA1_1: A1.1 U4.2 | length 164.8
  Bottom4 w10: U4.2 1152.26,1230.58 ccw(c1152.26,1262.74) 1175,1240 ccw(c1150.86,1264.14) 1185,1264.14 A1.1
NetC3_2: C3.2 U1.4 | length 42
  Bottom4 w6: C3.2 450,402 U1.4
NetC13_1: C13.1 U5.10 | length 90.3
  Bottom4 w6: U5.10 1095.16,60.84 1102,54 1123,54 1145,32 C13.1
NetC14_2: C14.2 U5.20 | length 103.3
  Bottom4 w6: C14.2 1061,283 1075.47,268.53 U5.20
NetD1_1: D1.1 Q1.1 Q2.3 R3.2 | length 323.1
  Signal2 w10: v1(193.35,482) 220.35,455 410,455 v1(411,456)
  Bottom4 w10: R3.2 v1(193.35,482) ; D1.1 212.66,462.68 v1(193.35,482) ; Q1.1 v1(193.35,482)
NetD3_2: D3.2 Q2.1 R7.2 | length 169.3
  Bottom4 w10: R7.2 365,558.46 Q2.1 377.6,617.06 D3.2
NetD4_2: D4.2 R10.1 | length 30
  Bottom4 w10: D4.2 R10.1
NetQ3_2: Q3.2 R9.2 | length 94.7
  Bottom4 w4: R9.2 1105,892 1138,892 1150,880 Q3.2
NetQ3_5: Q3.5 R13.2 | length 91.4
  Bottom4 w4: Q3.5 1150,904 1158,896 1199,896 R13.2
NetQ4_3: Q4.3 R14.1 | length 150.3
  Bottom4 w6: Q4.3 895,149 910,164 R14.1
NetQ5_3: Q5.3 U6.2 | length 57.2
  Bottom4 w6: Q5.3 U6.2@1046.26,322
NetR1_2: R1.2 U2.9 | length 49.5
  Bottom4 w6: R1.2 499.37,452.63 U2.9
NetR6_2: R6.2 U2.26 | length 602.3
  Bottom4 w4: U2.26 727.69,472.31 751,449 803,449 858,504 858,814 833,839 833,900 R6.2
NetR8_1: R8.1 U3.5 | length 43.2
  Bottom4 w10: U3.5 387.4,215 395,222.6 R8.1
NetR15_2: R15.2 USB1.B5 | length 68.6
  Bottom4 w4: USB1.B5 551.1,298.1 R15.2
NetR16_1: R16.1 USB1.A5 | length 93.8
  Bottom4 w4: USB1.A5 669.21,295.21 691,317 R16.1
RTS: Q3.1 R13.1 U2.24 | length 679.8
  Signal2 w4: v1(822,548) 822,571 1023,772 1101.37,772 v1(1169.37,840)
  Bottom4 w4: U2.24 726.69,511.68 752,537 811,537 v1(822,548) ; v1(1169.37,840) 1169.69,840.31 Q3.1
  Bottom4 w7: Q3.1 1178.15,872 R13.1
SENSOR_VN: U4.8
SENSOR_VP: U4.5
USB-PWR-DM: U2.5 USB1.A7 USB1.B7 | length 320.2
  Bottom4 w4: U2.5 600.32,316.68 610.16,306.84 USB1.A7 610.16,193.84 620,184 639,184 649.53,194.53 USB1.B7
USB-PWR-DP: U2.4 USB1.A6 USB1.B6 | length 282.8
  Signal2 w4: v2(591,214) 604,201 615,201 628,214 v2(630,214)
  Bottom4 w4: USB1.B6 590.47,214.53 v2(591,214) ; U2.4 620,319 629.84,309.16 USB1.A6 629.84,214.16 v2(630,214)
VBAT: Q1.3 R2.2 U1.1 U1.3 U6.1 | length 2513.3
  Top1 w15: v1(146,552) 305,552 v1(310,547)
  Signal2 w10: v1(310,547) 305,552 v2(276,552) v1(146,552) 103,509 103,131 147,87 298,87 339,128 1169,128 1196,155 1196,296 v1(1170,322)
  Bottom4 w10: v2(276,552) 305,552 v1(310,547) 279,516 279,385 296,368 329,368 ; U1.1 359,314 329,344 329,368 ; U1.3 351,390 329,368 ; v1(1170,322) U6.1@1203.74,322
VBAT_IN: C7.2 C8.2 pad.@65,607 Q1.2 R3.1 U3.3 | length 1006.9
  Top1 w15: v1(146,482) 117,511 117,574 130,587 v1(146,587) 209.4,587 v1(212,584.4)
  Bottom4 w10: pad.@65,607 80,622 C8.2 C7.2
  Bottom4 w15: v1(146,482) 141.25,477.25 135,471 82,471 60,449 60,137 116,81 309.54,81 U3.3
VCC_3V3: C1.2 C2.2 C11.2 C12.1 C15.2 CON1.7 R5.1 R11.2 R18.1 R19.2 R20.2 R21.1 R22.1 R23.1 R25.1 R26.1 S1.3 S1.4 TF1.4 U1.5 U5.8 U5.13 | length 3360.7
  Top1 w6: v2(434,291) 447,278 679.26,278 696.13,294.87 ; S1.4 688.57,302.43 696.13,294.87 ; S1.3 716.13,294.87 ; v1(1191,33) 1155,69 v1(1000,69) 930,69 827,172 827,255 805,277 734,277 716.13,294.87 ; 696.13,294.87 716.13,294.87
  Top1 w10: S1.4 688.57,378.57 v2(703,393) 716.13,379.87 S1.3
  Top1 w15: S1.3@716.13,379.87 716.13,476.87 630,563 630,727 655,752 839,752 853,766 853,801 ; v1(826,801) 853,801 ; v1(940,824) 876,824 853,801
  Bottom4 w6: CON1.7 282.16,276.84 285,274 330,274 338,282 360,282 369,291 389,291 412,314 457,314 U1.5 ; R26.1 725,1242 R21.1 R23.1 R22.1 R25.1 760,1085 769,1076 769,980 755.31,966.31 755.31,931.69 ; v1@1003,69 v1(1000,69) ; U5.13 1022.32,91.32 v1(1000,69) ; C12.1 1038,30 R11.2 980,49 v1(1000,69) ; U5.8 1134.53,62.47 1143,54 1170,54 v1(1191,33) 1193,35 C15.2@1212,35
  Bottom4 w10: v2(703,393) 714,393 C11.2 ; 755.31,931.69 R5.1 775,865 811,829 811,816 v1(826,801)
  Bottom4 w15: v2(434,291) U1.5@457,314 ; U1.5 465,317 C2.2 C1.2 ; TF1.4@660,931.69 755.31,931.69 ; v1(940,824) 975,859 R18.1 R19.2 R20.2
VUSB: C9.2 D4.1 R1.1 U2.7 U2.8 U3.4 USB1.A4 USB1.A9 USB1.B4 USB1.B9 | length 1630.9
  Top1 w6: v1(405,399) 405,281 420,266 477,266 530,213 530,183 v1(561,152)
  Top1 w15: v1(276,56) 276,108 v1(313,145) 344,114 523,114 v1(561,152) v1(650,152)
  Bottom4 w6: v1(405,399) 405,417 435,447 465,447 R1.1
  Bottom4 w10: R1.1 490.95,432.94 U2.8 528.5,410.5 538.5,400.5 U2.7 ; USB1.A9 519.61,218.39 531.42,206.58 ; USB1.B4 531.42,206.58 ; USB1.B9 708.58,208.58 ; USB1.A4 720.39,220.39 708.58,208.58 ; 531.42,206.58 561,177 v1(561,152) 652,152 708.58,208.58
  Bottom4 w15: v1(276,56) 290,42 D4.1 ; C9.2 312.6,249.4 312.6,145.4 v1(313,145)
pads on no net: A1. S1.12 TF1.1 TF1.8 U2.1 U2.2 U2.6 U2.10 U2.11 U2.12 U2.13 U2.14 U2.15 U2.16 U2.17 U2.18 U2.19 U2.20 U2.21 U2.22 U2.23 U2.27 U4.26 U4.44 U4.45 U4.47 U4.48 U5. U5.2 U5.3 U5.4 U5.5 U5.6 U5.7 U5.12 U5.14 U5.15 U5.16 U5.17 U5.19 U5.21 U5.22 USB1.0 USB1.A8 USB1.B8
copper on no net:
  other v3: 235.24,780.91 235.24,1095.08
  other v4: 902.83,528.89 902.83,765.11

## Polygon pours and split planes (outlines as drawn)
GND on Gnd3 "GND_L03_P003" (solid, remove dead copper, pour order 3): 0,1340 1240,1340 1240,0 0,0
GND on Top1 "GND_L01_P000" (solid, remove dead copper, pour order 0): 0,1340 1240,1340 1240,0 0,0
GND on Signal2 "GND_L02_P001" (solid, remove dead copper, pour order 1): 0,1340 1240,1340 1240,0 0,0
GND on Bottom4 "GND_L04_P004" (solid, remove dead copper, pour order 4): 0,1340 1240,1340 1240,0 0,0

## Keep-outs
Keep-Out Layer:
  the board outline again, w10

## Other copper
Top1:
  pour cut-out: 1240,1340 1110,1340 1110,1060 1240,1060
Signal2:
  pour cut-out: 1240,1340 1110,1340 1110,1060 1240,1060
Gnd3:
  pour cut-out: 1240,1340 1110,1340 1110,1060 1240,1060
Bottom4:
  pour cut-out: 1240,1340 1110,1340 1110,1060 1240,1060

## Silkscreen, mask and mechanical layers (free items; w line width, h text height)
Top Overlay:
  lines w10: 77.94,632.7 77.94,747.7
  text "Ver 1.3" at 102.94,712.7 h55
  text "Designed by" at 287.94,712.7 h50
  text "@ESP32" at 624,637 h70
  text "Pengzhihui" at 107.94,632.7 h90
  text "LCD 240x240" at 73,496 h140
Bottom Overlay:
  text "+" at 92.51,530.24 h50
  text "-" at 92.51,432.24 h50
Top Solder:
  rectangle: 1120,1060 1240,1340
  text "Peak" at 69.96,950 h140
  text "Visual" at 82.76,817.61 h100
Bottom Solder:
  rectangle: 1120,1060 1240,1340
Mechanical 1:
  lines w10: 0,0 0,1340 1240,1340 ; 0,0 0,0 ; 0,0 1240,0 1240,1340 ; 1240,1340 1240,1340